# Altium PCB PCB_ICM-42670-P_2_2024-09-11.pcbdoc
Units mil, origin at the board's own origin, x right, y up, seen from the top; angles counter-clockwise.
Board outline 2098.3 x 1722.1 mil, 2 copper layers (Top Layer, Bottom Layer); 16 components, 13 nets, 47 pads, 9 vias.
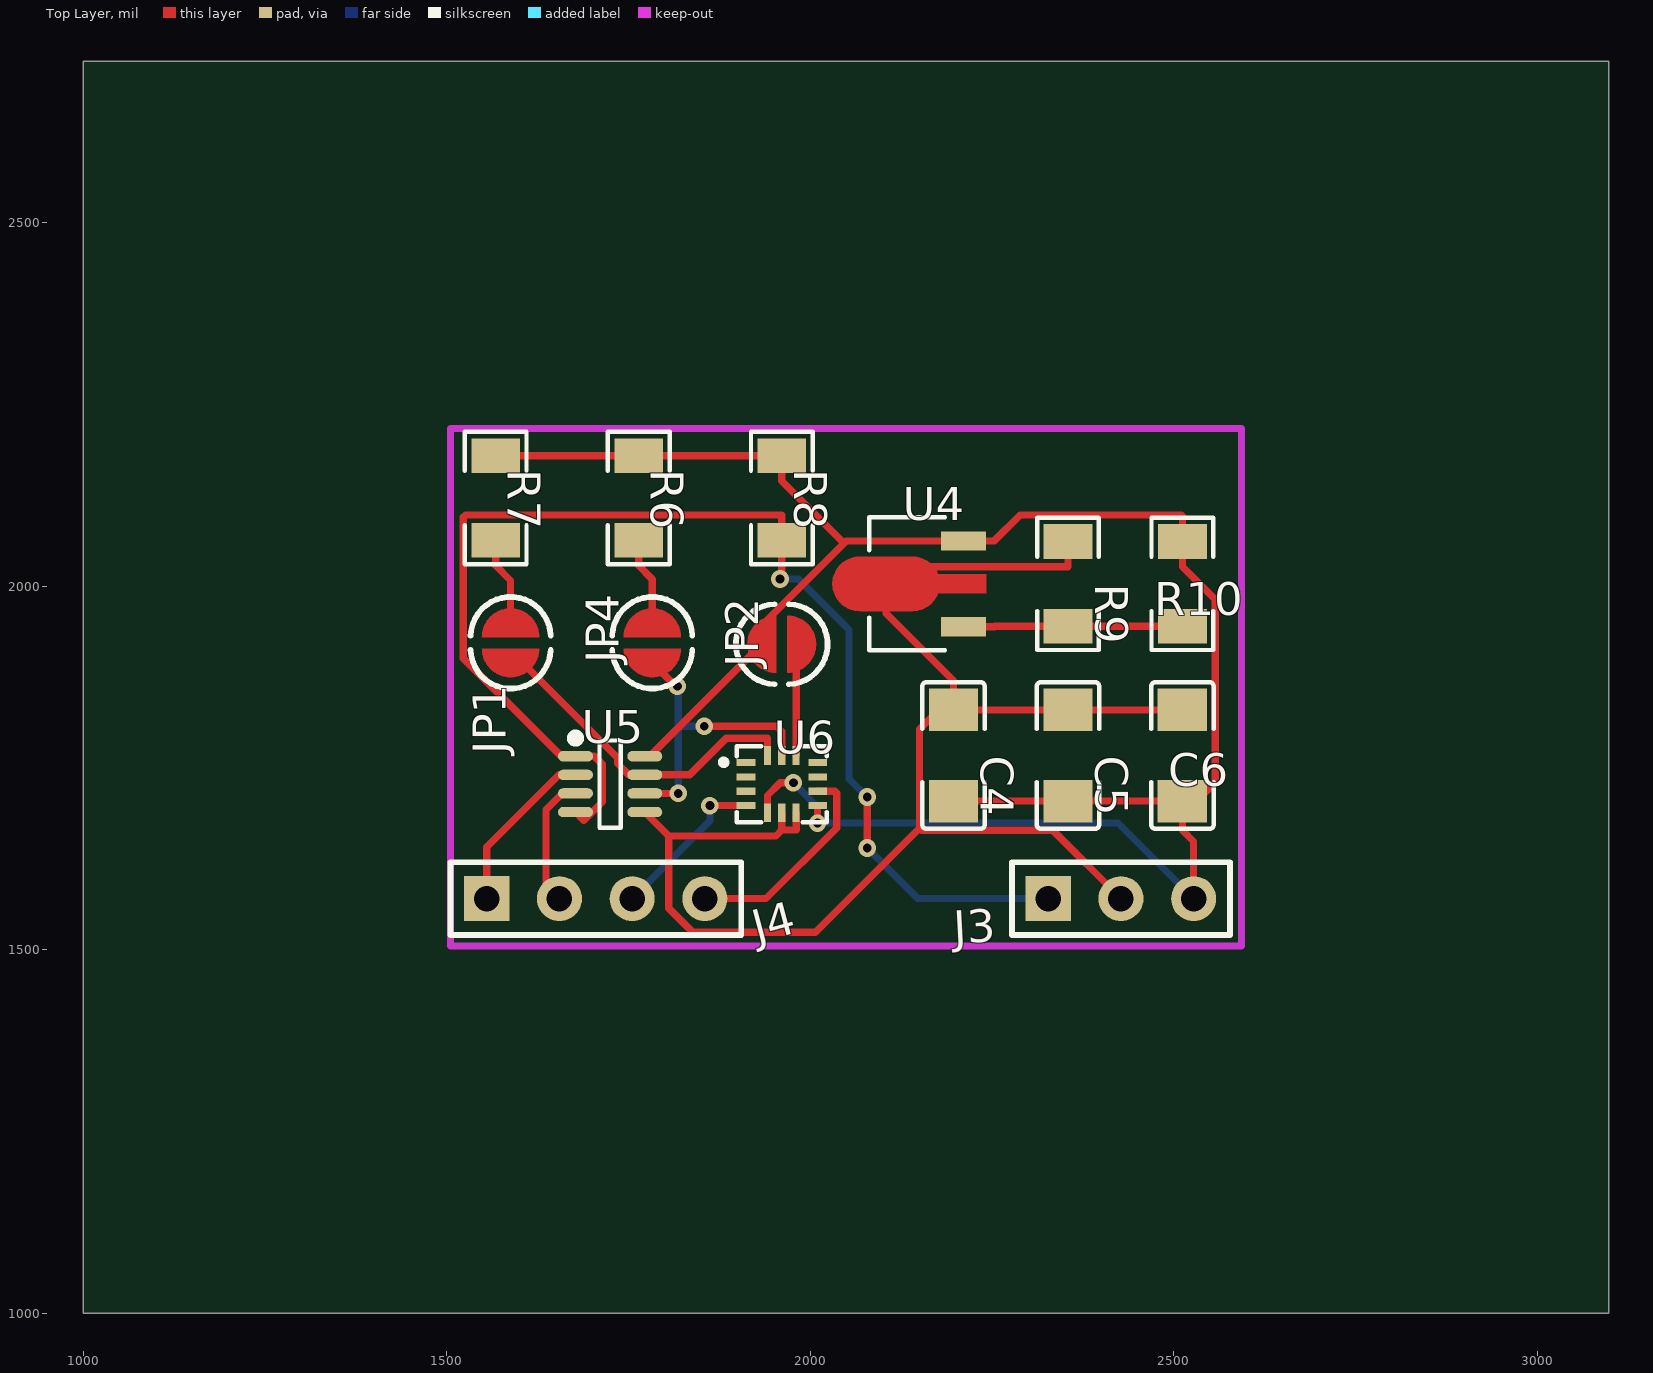
[diagram p0: Top Layer view]
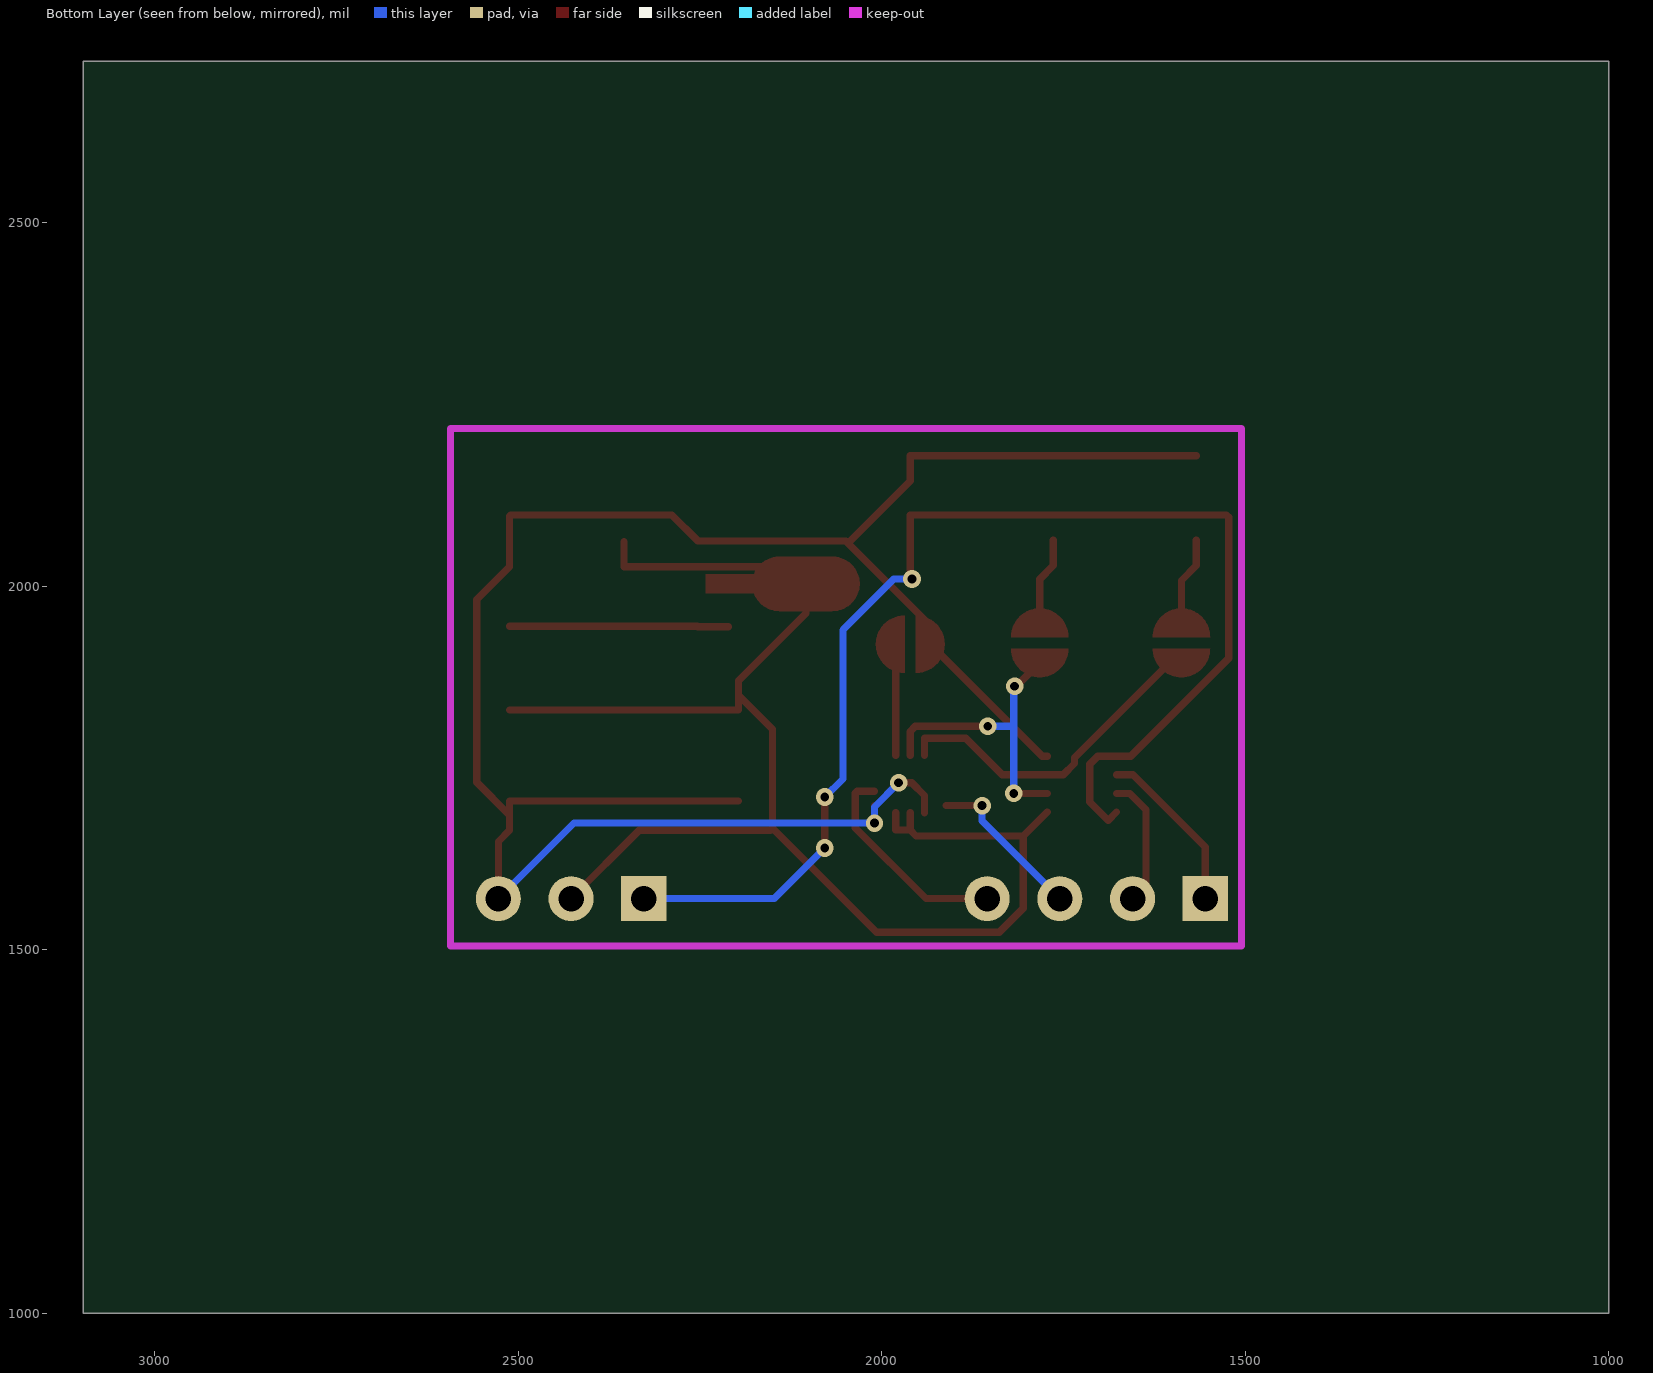
[diagram p1: Bottom Layer view, seen from below]

## Layer stack, top to bottom
Top Layer: signal copper (thickness not stored)
Dielectric: dielectric 12.6, FR-4, Dk 4.8
Bottom Layer: signal copper (thickness not stored)

## Board outline
3098.3,1000 1000,1000 1000,2722.1 3098.3,2722.1

## Components (designator, comment, footprint, x,y, rotation, side; value= is the part's Value field where it differs from the comment)
C4 "100nF" C1206 2197.07,1767.17 r270 top
C5 "220nF" C1206 2354.55,1767.17 r270 top
C6 "10nF" C1206 2512.03,1767.17 r270 top
J3 "HDR-M-2.54_1x3" HDR-M-2.54_1X3 2427.38,1570.32 r0 top
J4 "HDR-M-2.54_1x4" HDR-M-2.54_1X4 1704.94,1570.32 r0 top
JP1 "SBU" "SOLDER BRIDGE 2P UNBRIDGED" 1587.69,1920.28 r90 top
JP2 "SBU" "SOLDER BRIDGE 2P UNBRIDGED" 1962.69,1920.28 r180 top
JP4 "SBU" "SOLDER BRIDGE 2P UNBRIDGED" 1782.69,1920.28 r90 top
R6 "10kΩ" R1206 1763.99,2121.5 r270 top
R7 "10kΩ" R1206 1567.14,2121.5 r270 top
R8 "100Ω" R1206 1960.85,2121.5 r90 top
R9 "3kΩ" R1206 2354.55,2003.39 r270 top
R10 "1kΩ" R1206 2512.03,2003.39 r90 top
U4 "TL431G-AB3-R" SOT-89-3_L4.5-W2.5-P1.50-LS4.2-BR 2157.7,2003.39 r0 top
U5 "RS0102YH8" SOT-23-8_L3.0-W1.7-P0.65-LS2.8-BL 1724.62,1727.8 r270 top
U6 "ICM-42670-P" LGA-14_L3.0-W2.5-P0.50-TL_QMI8658A 1960.85,1727.8 r0 top

## Footprints (in the part's own frame and the unit in brackets; to place one, negate y for a bottom-side part, rotate by r counter-clockwise, add the part's x,y. Pads: shape width x height; smd on the part's side, far side on the other; paste and mask are expansions set on the pad)
C1206 [mm]
  rect 1.485x1.728 smd paste-100 mask+0.051: 1(-1.593,0) 2(1.593,0)
  silkscreen extent -2.56,-1.09 2.56,1.09
HDR-M-2.54_1X3 [mil]
  rect 62x62 hole 35 paste+0 mask+2: 1(-100,0)
  round 62 hole 35 paste+0 mask+2: 2(0,0) 3(100,0)
  silkscreen extent -150,-50 150,50
HDR-M-2.54_1X4 [mil]
  rect 62x62 hole 35 paste+0 mask+2: 1(-150,0)
  round 62 hole 35 paste+0 mask+2: 2(-50,0) 3(50,0) 4(150,0)
  silkscreen extent -200,-50 200,50
LGA-14_L3.0-W2.5-P0.50-TL_QMI8658A [mm]
  rect 0.65x0.25 smd paste+0 mask+0.051: 1(-1.25,0.75) 2(-1.25,0.25) 3(-1.25,-0.25) 4(-1.25,-0.75) 8(1.25,-0.75) 9(1.25,-0.25) 10(1.25,0.25) 11(1.25,0.75)
  rect 0.25x0.65 smd paste+0 mask+0.051: 5(-0.5,-1) 6(0,-1) 7(0.5,-1) 12(0.5,1) 13(0,1) 14(-0.5,1)
  silkscreen extent -2.13,-1.33 1.58,1.33
R1206 [mil]
  rect 47.54x66.97 smd paste-3937.01 mask+2: 1(-58.22,0) 2(58.22,0)
  silkscreen extent -91,-42 91,42
"SOLDER BRIDGE 2P UNBRIDGED" [mil]
  Top Layer region: 9.84,-39.37 11.66,-39.33 13.48,-39.2 15.28,-38.99 17.08,-38.7 18.86,-38.32 20.62,-37.87 22.35,-37.33 24.06,-36.71 25.74,-36.02 27.39,-35.24 29,-34.39 30.57,-33.47 32.09,-32.48 33.57,-31.42 34.99,-30.29 36.37,-29.1 37.68,-27.84 38.94,-26.52 40.13,-25.15 41.26,-23.73 42.32,-22.25 43.32,-20.73 44.24,-19.16 45.09,-17.55 45.86,-15.9 46.55,-14.22 47.17,-12.51 47.71,-10.77 48.17,-9.01 48.54,-7.23 48.83,-5.44 49.04,-3.63 49.17,-1.82 49.21,0 49.17,1.82 49.04,3.63 48.83,5.44 48.54,7.23 48.17,9.01 47.71,10.77 47.17,12.51 46.55,14.22 45.86,15.9 45.09,17.55 44.24,19.16 43.32,20.73 42.32,22.25 41.26,23.73 40.13,25.15 38.94,26.52 37.68,27.84 36.37,29.1 34.99,30.29 33.57,31.42 32.09,32.48 30.57,33.47 29,34.39 27.39,35.24 25.74,36.01 24.06,36.71 22.35,37.33 20.62,37.87 18.86,38.32 17.08,38.7 15.28,38.99 13.48,39.2 11.66,39.33 9.84,39.37
  Top Layer region: -5.91,-39.37 -7.72,-39.33 -9.54,-39.2 -11.35,-38.99 -13.14,-38.7 -14.92,-38.32 -16.68,-37.87 -18.42,-37.33 -20.13,-36.71 -21.81,-36.02 -23.46,-35.24 -25.06,-34.39 -26.63,-33.47 -28.16,-32.48 -29.63,-31.42 -31.06,-30.29 -32.43,-29.1 -33.75,-27.84 -35,-26.52 -36.2,-25.15 -37.32,-23.73 -38.39,-22.25 -39.38,-20.73 -40.3,-19.16 -41.15,-17.55 -41.92,-15.9 -42.62,-14.22 -43.24,-12.51 -43.77,-10.77 -44.23,-9.01 -44.61,-7.23 -44.9,-5.44 -45.11,-3.63 -45.23,-1.82 -45.28,0 -45.23,1.82 -45.11,3.63 -44.9,5.44 -44.61,7.23 -44.23,9.01 -43.77,10.77 -43.24,12.51 -42.62,14.22 -41.92,15.9 -41.15,17.55 -40.3,19.16 -39.38,20.73 -38.39,22.25 -37.32,23.73 -36.2,25.15 -35,26.52 -33.75,27.84 -32.43,29.1 -31.06,30.29 -29.63,31.42 -28.16,32.48 -26.63,33.47 -25.06,34.39 -23.46,35.24 -21.81,36.01 -20.13,36.71 -18.42,37.33 -16.68,37.87 -14.92,38.32 -13.14,38.7 -11.35,38.99 -9.54,39.2 -7.72,39.33 -5.91,39.37
  silkscreen extent -61,-55 65,55
SOT-23-8_L3.0-W1.7-P0.65-LS2.8-BL [mm]
  oval 0.364x1.222 smd paste+0 mask+0.051: 1(-0.975,-1.211) 2(-0.325,-1.211) 3(0.325,-1.211) 4(0.975,-1.211) 5(0.975,1.211) 6(0.325,1.211) 7(-0.325,1.211) 8(-0.975,1.211)
  silkscreen extent -1.76,-1.36 1.53,0.37
SOT-89-3_L4.5-W2.5-P1.50-LS4.2-BR [mm]
  rect 1.575x0.672 smd paste+0 mask+0.051: 1(1.356,-1.5) 3(1.356,1.5)
  Top Layer region: -2.283,0.95 -0.429,0.95 -0.384,0.949 -0.34,0.946 -0.296,0.94 -0.252,0.933 -0.208,0.924 -0.165,0.912 -0.123,0.899 -0.081,0.884 -0.04,0.866 0,0.847 0.04,0.826 0.078,0.803 0.115,0.779 0.151,0.752 0.185,0.724 0.219,0.695 0.251,0.664 0.281,0.631 0.31,0.597 0.337,0.562 0.362,0.525 0.386,0.488 0.408,0.449 0.428,0.409 0.447,0.33 2.144,0.33 2.144,-0.33 0.447,-0.33 0.428,-0.409 0.408,-0.449 0.386,-0.488 0.362,-0.526 0.337,-0.562 0.31,-0.597 0.281,-0.631 0.251,-0.664 0.219,-0.695 0.185,-0.725 0.151,-0.753 0.115,-0.779 0.078,-0.804 0.04,-0.827 0,-0.848 -0.04,-0.867 -0.081,-0.884 -0.123,-0.899 -0.165,-0.913 -0.208,-0.924 -0.252,-0.934 -0.296,-0.941 -0.34,-0.946 -0.384,-0.949 -0.429,-0.95 -2.283,-0.95 -2.328,-0.949 -2.372,-0.946 -2.416,-0.941 -2.46,-0.934 -2.504,-0.924 -2.547,-0.913 -2.589,-0.899 -2.631,-0.884 -2.672,-0.867 -2.713,-0.848 -2.752,-0.827 -2.79,-0.804 -2.827,-0.779 -2.863,-0.753 -2.898,-0.725 -2.931,-0.695 -2.963,-0.664 -2.993,-0.631 -3.022,-0.597 -3.049,-0.562 -3.075,-0.526 -3.098,-0.488 -3.12,-0.449 -3.141,-0.409 -3.159,-0.369 -3.175,-0.327 -3.189,-0.285 -3.202,-0.242 -3.212,-0.199 -3.22,-0.155 -3.227,-0.111 -3.231,-0.067 -3.233,-0.022 -3.233,0.022 -3.231,0.067 -3.227,0.111 -3.22,0.155 -3.212,0.199 -3.202,0.242 -3.189,0.285 -3.175,0.327 -3.159,0.369 -3.141,0.409 -3.12,0.449 -3.098,0.488 -3.075,0.525 -3.049,0.562 -3.022,0.597 -2.993,0.631 -2.963,0.664 -2.931,0.695 -2.898,0.724 -2.863,0.752 -2.827,0.779 -2.79,0.803 -2.752,0.826 -2.713,0.847 -2.672,0.866 -2.631,0.884 -2.589,0.899 -2.547,0.912 -2.504,0.924 -2.46,0.933 -2.416,0.94 -2.372,0.946 -2.328,0.949
  silkscreen extent -1.95,-2.33 0.7,2.33

## Via types
v1: diameter 24, hole 12, Top Layer to Bottom Layer, tented both sides, 6 vias
v2: diameter 24.41, hole 12.2, Top Layer to Bottom Layer, tented both sides, 3 vias

## Nets (pads, with @x,y where several pads share a name; then routed paths per layer and width w, separated by ;. In a path a pad name is that pad's centre, name@x,y a point inside that pad or via, vN(x,y) a via of type N, cw(c..) or ccw(c..) an arc to the next point about the centre after c; other vN are vias at no path point)
3.3V: C4.2 C5.2 C6.2 J3.3 R6.1 R7.1 R8.2 R10.2 U4.3 U5.8 U6.5 U6.8 | length 3066.8
  Top Layer w10: R7.1 R6.1 R8.2 1960.85,2144.94 2046.42,2059.37 ; U5.8 1779.08,1766.19 1933.17,1920.28 1933.17,1946.12 2046.42,2059.37 ; U6.5 1941.16,1712.24 1958.5,1729.58 v1(1976.84,1729.58) ; v1(2009.96,1674.24) 2009.96,1698.17 U6.8 ; C4.2 2354.55,1704.47 C6.2 C6.2@2512.03,1685.17 ; J3.3 2527.38,1648.88 2512.03,1664.23 2512.03,1684.35 C6.2@2512.03,1685.17 ; 2046.42,2059.37 2049.5,2062.45 2190.09,2062.45 2211.09,2062.45 2253.11,2062.45 2288.77,2098.11 2510.31,2098.11 2512.03,2096.39 R10.2 2512.03,2026.83 2557.11,1981.75 2557.11,1730.25 C6.2@2512.03,1685.17
  Bottom Layer w10: v1(1976.84,1729.58) 2009.96,1696.46 v1(2009.96,1674.24) 2423.46,1674.24 J3.3
5V: J3.1 R8.1 U5.1 U5.4 | length 2209.4
  Top Layer w10: U5.4 1688.52,1677.84 1713.8,1703.12 1713.8,1755.19 1702.8,1766.19 U5.1 1657.58,1766.19 1522.61,1901.16 1522.61,2095.2 1525.52,2098.11 1960.8,2098.11 1960.85,2098.06 R8.1 ; v2(2078.3,1640) v2(2078.3,1710) ; v2@1960.85,2012.55 R8.1 ; v2@1960.85,2012.55 v2(1958.3,2010) v2@1960.84,2012.54 ; v2@1960.84,2012.54 R8.1
  Bottom Layer w10: v2(2078.3,1640) 2147.98,1570.33 J3.1 ; 1983.3,2010 v2(1958.3,2010) 1983.3,2010 ; 1983.3,2010 2053.3,1940 ; 1983.3,2010 2053.3,1940 ; 2053.3,1735 2053.3,1940 ; 2053.3,1735 v2(2078.3,1710) 2053.3,1735 ; 2053.3,1735 2053.3,1940
DSA: J4.1 U5.2 | length 234.1
  Top Layer w10: J4.1 1554.94,1641.22 1654.31,1740.59 U5.2
GND: C4.1 C5.1 C6.1 J3.2 R9.1 U5.5 U6.6 U6.7 | length 2132.7
  Top Layer w10: U5.5 1805.16,1656.56 ; U6.6 1960.84,1676.53 1960.84,1667.53 ; U6.7 1980.53,1664.62 1963.75,1664.62 1960.84,1667.53 ; R9.1@2354.55,2061.61 2354.55,2026.83 2127.74,2026.83 2104.3,2003.39 2104.3,1962.88 2197.07,1870.11 C4.1@2197.07,1849.99 ; J3.2 2333.52,1664.18 2153.18,1664.18 2150.27,1667.09 ; C6.1 2354.55,1829.87 C4.1 C4.1@2197.07,1849.99 ; 1805.16,1656.56 1805.16,1557.08 1838.29,1523.95 2007.13,1523.95 2150.27,1667.09 ; 1805.16,1656.56 1952.78,1656.56 1960.84,1664.62 1960.84,1667.53 ; 2150.27,1667.09 2150.27,1803.19 C4.1@2197.07,1849.99
INT: J4.3 U6.4 | length 222
  Top Layer w10: v1(1861.92,1698.27) U6.4
  Bottom Layer w10: J4.3 1861.92,1677.3 v1(1861.92,1698.27)
INT2: J4.4 U6.9 | length 297
  Top Layer w10: J4.4 1939.22,1570.32 2036.4,1667.5 2036.4,1715.42 2033.86,1717.96 U6.9
R2_2: R9.2 R10.1 U4.1 | length 301.3
  Top Layer w10: U4.1 2253.11,1944.34 2253.94,1945.17 2354.55,1945.17 R10.1
R4_2: R7.2 | length 122
  Top Layer w10: R7.2 1567.15,2028.5 1587.7,2007.95 1587.7,1949.81
R5_2: R6.2 | length 121.2
  Top Layer w10: R6.2 1764,2028.5 1782.7,2009.8 1782.7,1949.81
SCL: J4.2 U5.3 | length 180
  Top Layer w10: J4.2 1636.29,1588.97 1636.29,1692.64 1658.65,1715 U5.3
U1_12: U6.12 | length 156.3
  Top Layer w10: U6.12 1980.53,1912.52 1988.29,1920.28
U1_13: U5.6 U6.13 | length 420.2
  Top Layer w10: U5.6 v1(1818.3,1715) ; 1782.7,1894.69 1815.03,1862.36 v1(1817.25,1862.36) ; v1@1854.05,1807.27 1953.76,1807.27 1960.84,1800.19 U6.13
  Bottom Layer w10: v1(1817.25,1862.36) 1818.3,1861.31 1818.3,1807.27 ; v1(1818.3,1715) 1818.3,1807.27 ; v1@1854.05,1807.27 1818.3,1807.27
  other v1: 1854.05,1807.27
U1_14: U5.7 U6.14 | length 466.7
  Top Layer w10: 1587.7,1894.69 1604.21,1894.69 1734.77,1764.13 1734.77,1756.04 1750.22,1740.59 U5.7 1834.17,1740.59 1884.56,1790.98 1941.16,1790.98 U6.14
pads on no net: U6.1 U6.2 U6.3 U6.10 U6.11